# Altium PCB NC1-1C-BASIS.PcbDoc (part 2 of 4)
Units mm, origin at the board's own origin, x right, y up, seen from the top; angles counter-clockwise.
Board outline 78 x 78 mm, 4 copper layers (Top Layer, Mid 1 (GND), Mid 2 (PWR), Bottom Layer), stack 1.586 mm thick; 292 components, 134 nets, 825 pads, 380 vias.
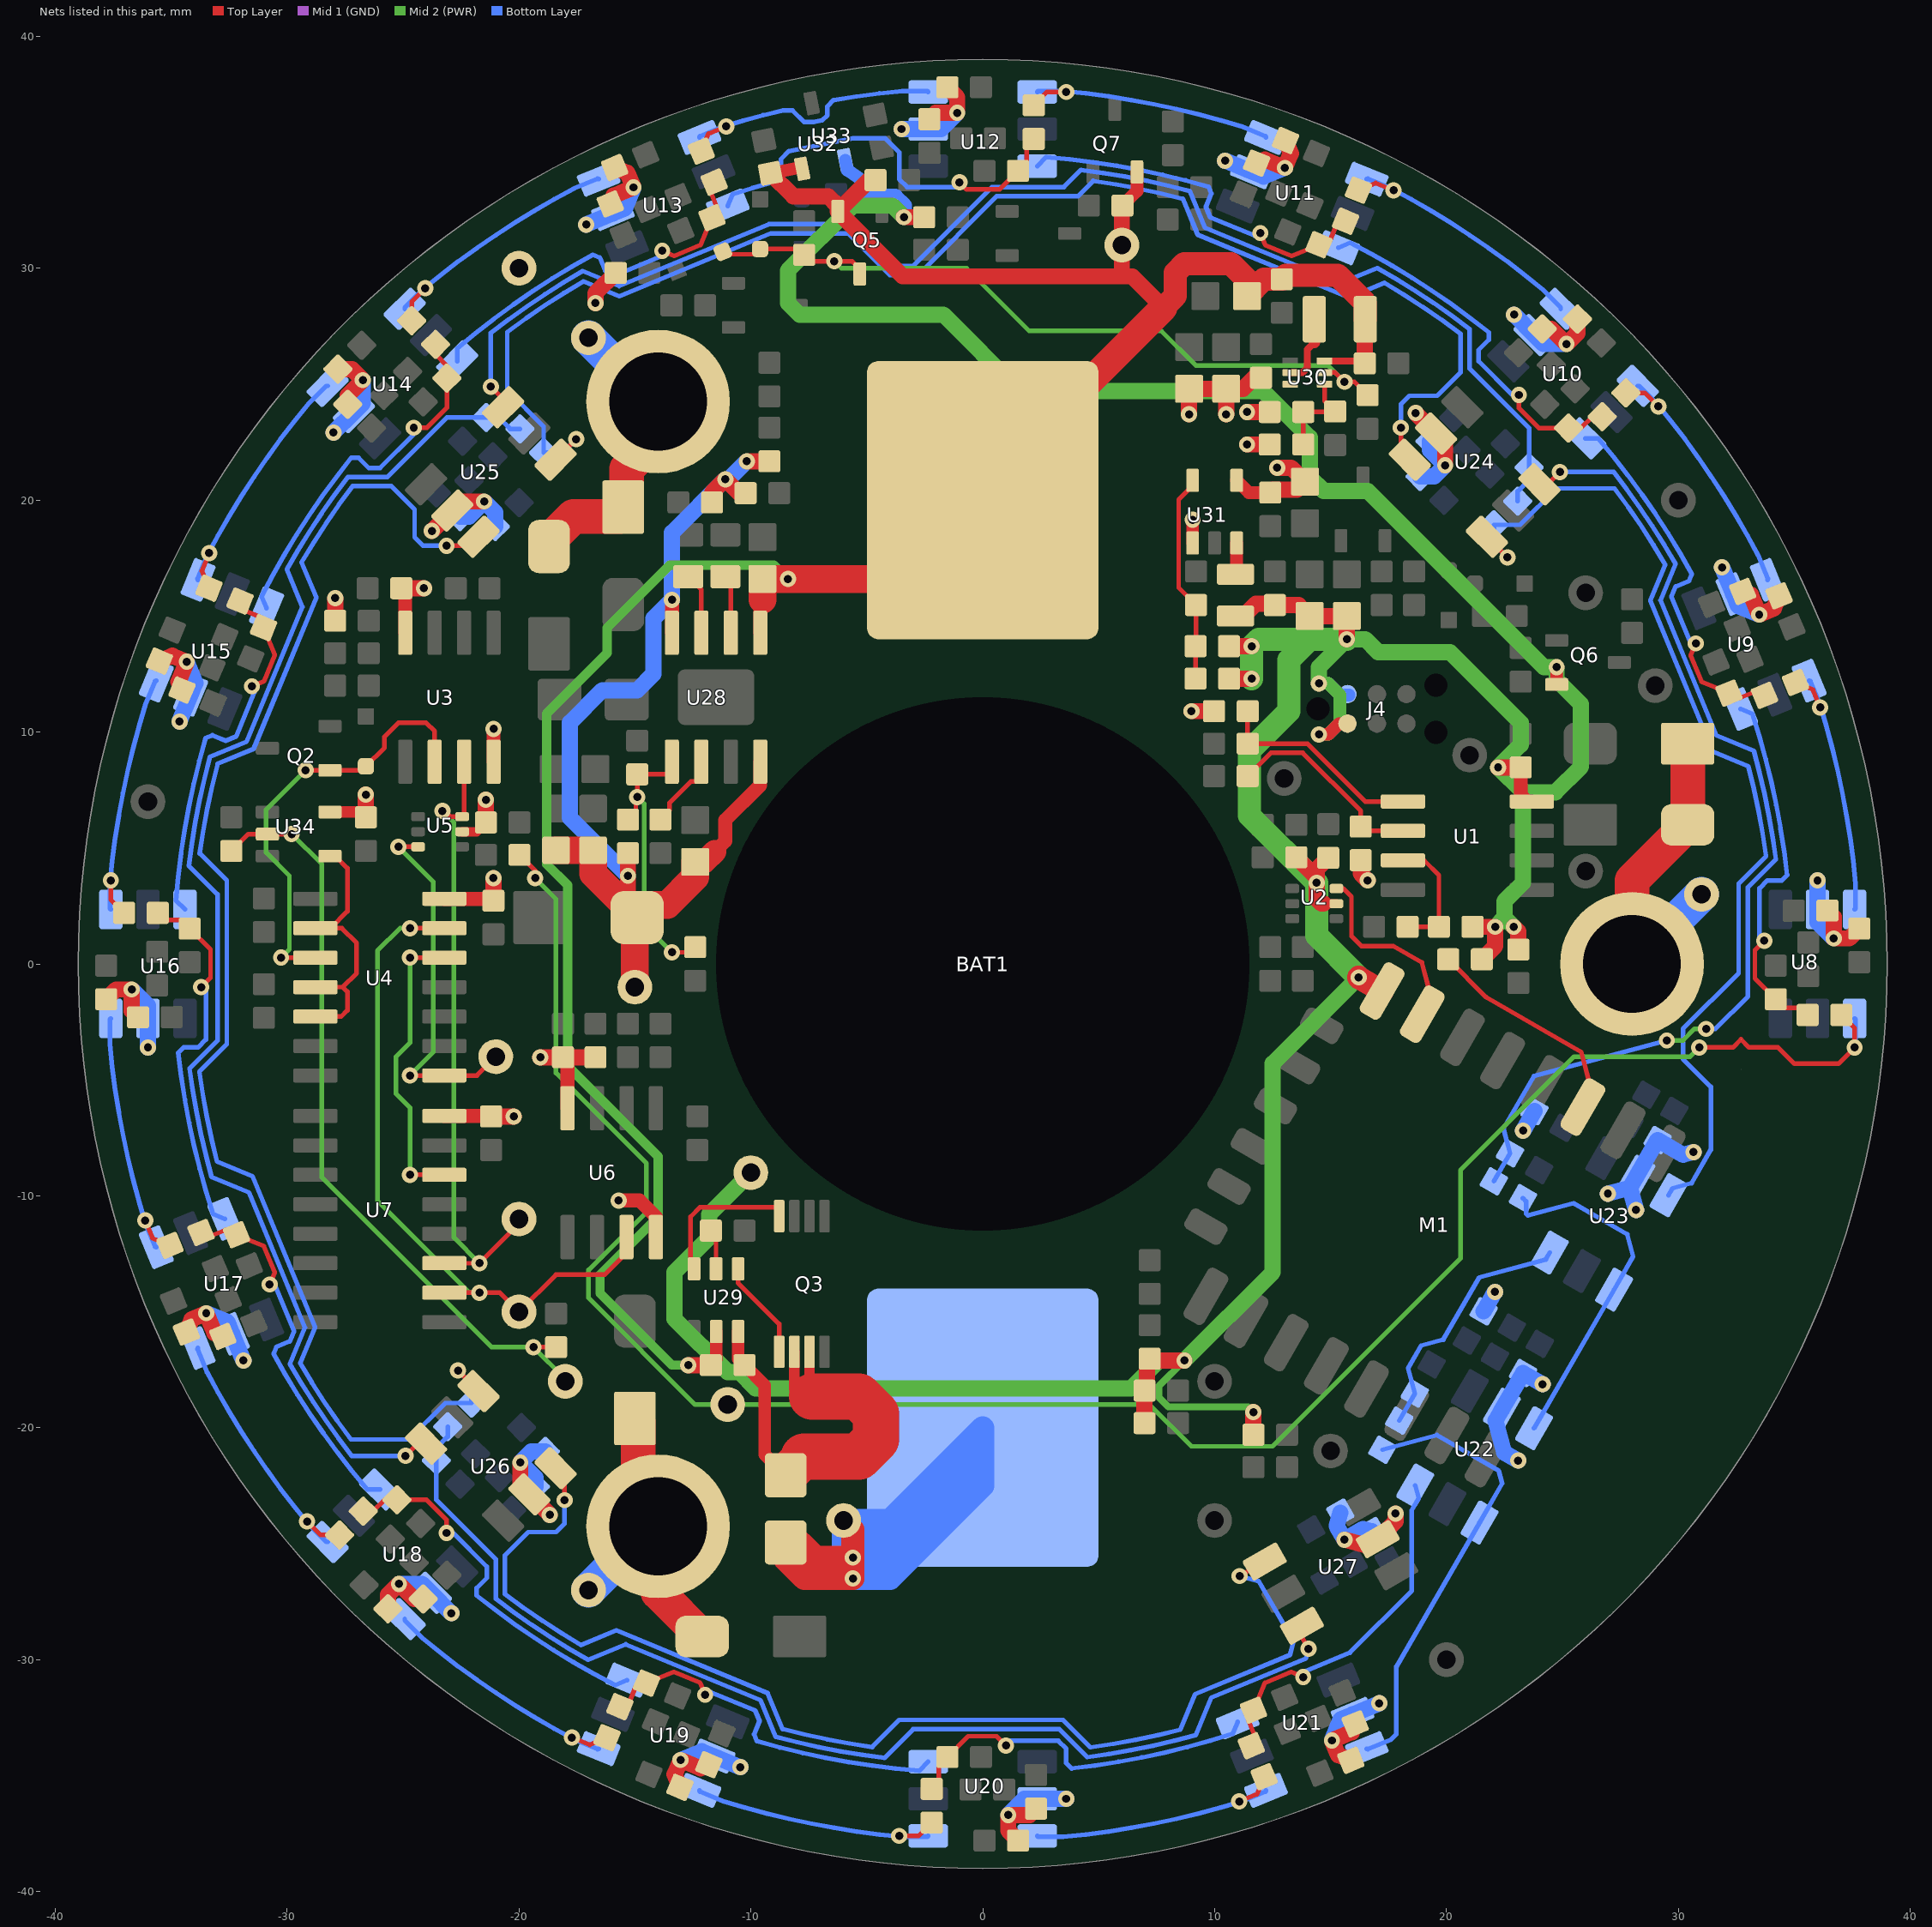
[diagram p4: the nets of this part, all layers, seen from the top]

## Part data (continued)
C58 C62: "CAP SM 0603 1.0nF 50V C0G", Absolute Value=1E-9, Manufacturer=GENERIC, Manufacturer 1=YAGEO, Manufacturer Part Number 1=CC0603JRNPO9BN102, Manufacturer Part Number 2=CC0603KRNPO9BN102, Package=0603, Supplier Part Number 1=311-1423-1-ND, Eurocircuits GPN=GPC0603102-C0G, HelpURL=https://www.yageo.com/upload/media/product/productsearch/datasheet/mlcc/UPY-GP_NP0_16V-to-50V_18.pdf, Manufacturer 2=YAGEO, Part Number=1.0N/0603/50V/C0G, Supplier 1=Digi-Key, Supplier 2=Digi-Key, Supplier Part Number 2=311-4026-1-ND
D1 D11 D12 D13 D14 D15: "40V 600mV@1A 1A SOD-323 Schottky Barrier Diodes (SBD) ROHS", Absolute Value=40V, JLC Type=Basic, Manufacturer=GENERIC, Manufacturer 3="Guangdong Hottech", Package=SOD323, HelpURL=https://datasheet.lcsc.com/lcsc/2204281430_Guangdong-Hottech-1N5819WS_C191023.pdf, Manufacturer Part Number 3=1N5819WS, Part Number=1N5819WS, Supplier 3=LCSC, Supplier Part Number 3=C191023
D2 D3 D4 D8 D9 D10: "Si Shottky Diode 3A DO-214AC", JLC Type=Basic, Manufacturer=GENERIC, Manufacturer 3=MDD, Package="DO-214AC, SMA", HelpURL=https://datasheet.lcsc.com/lcsc/2303141100_MDD-Microdiode-Electronics--SS34_C8678.pdf, Manufacturer Part Number 3=SS34, Part Number=SS34, Supplier 3=LCSC, Supplier Part Number 3=C8678
D5: "10.5V 6.45V 5.8V SMB(DO-214AA) TVS", Absolute Value=6.8V, JLC Type=Basic, Manufacturer="Littelfuse Inc.", Manufacturer 3=Brightking, Manufacturer Part Number 3=P6SMB6.8CA/TR13, Package=DO-214AA, HelpURL=https://datasheet.lcsc.com/lcsc/1810181007_Brightking-P6SMB6-8CA-TR13_C78395.pdf, Part Number=P6SMB6.8CA, Supplier 3=LCSC, Supplier Part Number 3=C78395
D6: library part "LED Green 0805", "Generic LED Green 0805", Absolute Value=Green, JLC Type=Basic, Manufacturer=GENERIC, Manufacturer 1=Würth, Manufacturer 3="Hubei KENTO Elec", Manufacturer Part Number 1=150080GS75000, Manufacturer Part Number 3=KT-0805G, Package=805, Supplier Part Number 1=732-4983-1-ND, HelpURL=https://www.we-online.com/katalog/datasheet/150060VS75000.pdf, Part Number="LED Green 0805", Supplier 1=Digi-Key, Supplier 3=LCSC, Supplier Part Number 3=C2297
D7: library part "LED Red 0805", "Generic LED Red 0805", Absolute Value=Red, JLC Type=Basic, Manufacturer=GENERIC, Manufacturer 1=Würth, Manufacturer 3="Foshan NationStar Optoelectronics", Manufacturer Part Number 1=150080RS75000, Manufacturer Part Number 3=NCD0805R1, Package=805, Supplier Part Number 1=732-4984-1-ND, HelpURL=https://www.we-online.com/katalog/datasheet/150060RS75000.pdf, Part Number="LED Red 0805", Supplier 1=Digi-Key, Supplier 3=LCSC, Supplier Part Number 3=C84256
F1 F2: "Multifuse 1206 1.5A", Absolute Value=1.5, JLC Type=Extended, Manufacturer=GENERIC, Manufacturer 1=Bourns, Manufacturer Part Number 1=MF-NSMF150-2, Package=1206, Supplier Part Number 1=MF-NSMF150-2CT-ND, HelpURL=https://www.bourns.com/docs/product-datasheets/mf-nsmf.pdf?sfvrsn=39c76af6_20, Manufacturer 3=Bourns, Manufacturer Part Number 3=MF-NSMF150-2, Part Number=1.5A/1206/Fuse, Supplier 1=Digi-Key, Supplier 3=LCSC, Supplier Part Number 3=C89655
J1 J2 J3: "Solder Nut M3x0.5, 2mm", JLC Type=Extended, Manufacturer=GENERIC, Manufacturer 2=PEM, Manufacturer 3=Sinhoo, Manufacturer Part Number 2=SMTSO-M3-2ET, Manufacturer Part Number 3=SMTSO3020MTJ, Part Number="PEM M3, 2mm", Supplier 2=Mouser, Supplier 3=LCSC, Supplier Part Number 2=153-SMTSO-M3-2ET, Supplier Part Number 3=C2915633
J4: "Tag-Connect 2030-NL, 6 pins, no legs, two-sided", Manufacturer=TAG-CONNECT, HelpURL=https://www.tag-connect.com/wp-content/uploads/bsk-pdf-manager/2022/06/TC2030-MCP-NL.pdf, Part Number=TAG-CON-6-NL-DUAL
J5: library part Solder_Jumper_2pin_0.3mm, "Solder jumper with two pins with a spacing of 0.3mm", Manufacturer=NONE, Part Number=Solder_Jumper_2pin_0.3mm
L1: "1UH 2520 Shielded Inductor SMD", Absolute Value=1E-6, JLC Type=Extended, Manufacturer=GENERIC, Manufacturer 1="INPAQ Technology Co., Ltd", Manufacturer 3=INPAQ, Manufacturer Part Number 1=WIP252010S-1R0MLDG, Manufacturer Part Number 3=WIP252012P-1R0ML, Package="2520 metric", Supplier Part Number 1=3526-WIP252010S-1R0MLDGCT-ND, HelpURL=https://mm.digikey.com/Volume0/opasdata/d220001/medias/docus/5561/WIP252010S%20L%20Series.pdf, Part Number=1UH/2520, Supplier 1=Digi-Key, Supplier 3=LCSC, Supplier Part Number 3=C315711
L2: "2.2UH 2016 Shielded Inductor SMD", Absolute Value=2.2E-6, JLC Type=Extended, Manufacturer=GENERIC, Manufacturer 1="INPAQ Technology Co., Ltd", Manufacturer 3=INPAQ, Manufacturer Part Number 1=WIP201610S-2R2MLDG, Manufacturer Part Number 3=WIP201610P-2R2ML, Package="2016 metric", Supplier Part Number 1=3526-WIP201610S-2R2MLDGCT-ND, HelpURL=https://mm.digikey.com/Volume0/opasdata/d220001/medias/docus/5561/WIP201610S%20L%20Series.pdf, Part Number=2.2UH/2016, Supplier 1=Digi-Key, Supplier 3=LCSC, Supplier Part Number 3=C315717
M1: "ESP8266 based Module with 4MByte Storage", JLC Type=Extended, Manufacturer=AI-Thinker, Manufacturer 3=Ai-Thinker, Manufacturer Part Number 3=ESP-12F(ESP8266MOD), Package=Board, Part Number=ESP-12F, Supplier 3=LCSC, Supplier Part Number 3=C82891
Q2: "Switching Transistor PNP Silicon", JLC Type=Extended, Manufacturer="ON SEMI", Manufacturer 3=ONSEMI, Manufacturer Part Number 3=MMBT4403LT1G, Package=SOT23, HelpURL=https://www.onsemi.com/pdf/datasheet/mmbt4403lt1-d.pdf, Part Number=MMBT4403L, Supplier 3=LCSC, Supplier Part Number 3=C78864
Q3: "20V 9A 7.6mΩ@4.5V,9A 1.25W 1.2V@250uA 2 N-Channel TSSOP-8", JLC Type=Extended, Manufacturer="Winsok Semicon", Package=TSSOP-8, HelpURL=https://www.lcsc.com/datasheet/lcsc_datasheet_2211141230_Winsok-Semicon-WSP8814_C148371.pdf, Manufacturer 3="Winsok Semicon", Manufacturer Part Number 3=WSP8814, Part Number=WSP8814, Supplier 3=LCSC, Supplier Part Number 3=C148371
Q5 Q6 Q7: "50V P-Channel MOSFET", JLC Type=Extended, Manufacturer=GENERIC, Manufacturer 1="Good-Ark Semiconductor", Manufacturer 3="Jiangsu Changjing Electronics Technology Co., Ltd.", Package=SOT23, Supplier Part Number 1=4786-BSS84CT-ND, HelpURL=https://goodarksemi.com/docs/datasheets/mosfets/BSS84.pdf, Manufacturer Part Number 1=BSS84, Manufacturer Part Number 3=BSS84, Part Number=BSS84, Supplier 1=Digi-Key, Supplier 3=LCSC, Supplier Part Number 3=C114481
Q8 Q9 Q10: "30V N-Channel MOSFET", JLC Type=Basic, Manufacturer="Alpha & Omega Semiconductor", Package=SOT23, HelpURL=https://aosmd.com/res/data_sheets/AO3400A.pdf, Manufacturer 3="Alpha & Omega Semiconductor", Manufacturer Part Number 3=AO3400A, Part Number=AO3400A, Supplier 3=LCSC, Supplier Part Number 3=C20917
R1 R2 R4 R5 R6 R7 R8 R10 R11 R12 R16 R17 R23 R91 R92: "RES SM 0603 1K5", Absolute Value=1500, JLC Type=Basic, Manufacturer=GENERIC, Manufacturer 1=YAGEO, Manufacturer 3="UNI-ROYAL(Uniroyal Elec)", Manufacturer Part Number 1=RC0603FR-131K5L, Manufacturer Part Number 2=RC0603FR-101K5L, Manufacturer Part Number 3=0603WAF1501T5E, Package=0603, Supplier Part Number 1=13-RC0603FR-131K5LCT-ND, HelpURL=https://www.yageo.com/upload/media/product/app/datasheet/rchip/pyu-rc_group_51_rohs_l.pdf, Manufacturer 2=YAGEO, Part Number=1K5/0603, Supplier 1=Digi-Key, Supplier 2=Digi-Key, Supplier 3=LCSC, Supplier Part Number 2=13-RC0603FR-101K5LCT-ND, Supplier Part Number 3=C22843
R3 R27 R28 R30 R31 R33 R34 R36 R37 R39 R40 R42 R43 R45 R46 R48 R49 R51 R52 R54 R55 R57 R58 R60 R61 R63 R64 R66 R67 R69 R70 R72 R73 R75 R76 R78 R79 R81 R82: "RES SM 0603 0R", Absolute Value=0, JLC Type=Basic, Manufacturer=GENERIC, Manufacturer 1=YAGEO, Manufacturer 3="UNI-ROYAL(Uniroyal Elec)", Manufacturer Part Number 1=RC0603FR-070RL, Manufacturer Part Number 2=RC0603FR-130RL, Manufacturer Part Number 3=0603WAF0000T5E, Package=0603, Supplier Part Number 1=311-0.0HRCT-ND, HelpURL=https://www.yageo.com/upload/media/product/app/datasheet/rchip/pyu-rc_group_51_rohs_l.pdf, Manufacturer 2=YAGEO, Part Number=0R/0603, Supplier 1=Digi-Key, Supplier 2=Digi-Key, Supplier 3=LCSC, Supplier Part Number 2=13-RC0603FR-130RLCT-ND, Supplier Part Number 3=C21189
  R3: Eurocircuits GPN=GPR06030R
R9 R24 R25 R26 R29 R32 R35 R38 R41 R44 R47 R50 R53 R56 R59 R62 R65 R68 R71 R74 R77 R80 R83 R86 R87: "RES SM 0603 270R", Absolute Value=270, JLC Type=Basic, Manufacturer=GENERIC, Manufacturer 1=YAGEO, Manufacturer 3="UNI-ROYAL(Uniroyal Elec)", Manufacturer Part Number 1=RC0603FR-13270RL, Manufacturer Part Number 2=RC0603FR-10270RL, Manufacturer Part Number 3=0603WAF2700T5E, Package=0603, Supplier Part Number 1=13-RC0603FR-13270RLCT-ND, HelpURL=https://www.yageo.com/upload/media/product/productsearch/datasheet/rchip/PYu-RC_Group_51_RoHS_L_12.pdf, Manufacturer 2=YAGEO, Part Number=270R/0603, Supplier 1=Digi-Key, Supplier 2=Digi-Key, Supplier 3=LCSC, Supplier Part Number 2=13-RC0603FR-10270RLCT-ND, Supplier Part Number 3=C22966
  R9: Eurocircuits GPN=GPR0603270R
R13 R98 R99 R101 R107: "RES SM 0603 22K", Absolute Value=22000, JLC Type=Basic, Manufacturer=GENERIC, Manufacturer 1=YAGEO, Manufacturer 3="UNI-ROYAL(Uniroyal Elec)", Manufacturer Part Number 1=RC0603FR-1322KL, Manufacturer Part Number 2=RC0603FR-1022KL, Manufacturer Part Number 3=0603WAF2202T5E, Package=0603, Supplier Part Number 1=13-RC0603FR-1322KLCT-ND, HelpURL=https://www.yageo.com/upload/media/product/app/datasheet/rchip/pyu-rc_group_51_rohs_l.pdf, Manufacturer 2=YAGEO, Part Number=22K/0603, Supplier 1=Digi-Key, Supplier 2=Digi-Key, Supplier 3=LCSC, Supplier Part Number 2=13-RC0603FR-1022KLCT-ND, Supplier Part Number 3=C31850
  R13: Eurocircuits GPN=GPR060322K
R14: "RES SM 0603 12K", Absolute Value=12000, Manufacturer=GENERIC, Manufacturer 1=YAGEO, Manufacturer Part Number 1=RC0603FR-1312KL, Manufacturer Part Number 2=RC0603FR-1012KL, Package=0603, Supplier Part Number 1=13-RC0603FR-1312KLCT-ND, Eurocircuits GPN=GPR060312K, HelpURL=https://www.yageo.com/upload/media/product/app/datasheet/rchip/pyu-rc_group_51_rohs_l.pdf, Manufacturer 2=YAGEO, Part Number=12K/0603, Supplier 1=Digi-Key, Supplier 2=Digi-Key, Supplier Part Number 2=13-RC0603FR-1012KLCT-ND
R15 R89: "RES NTC SM 0603 10K", Absolute Value=10000, JLC Type=Extended, Manufacturer=GENERIC, Manufacturer 1=Murata, Manufacturer 3=Sunlord, Manufacturer Part Number 1=NCU18XH103E60RB, Manufacturer Part Number 3=SDNT1608X103F3380FTF, Package=603, Supplier Part Number 1=490-18164-1-ND, HelpURL=https://www.murata.com/en-us/api/pdfdownloadapi?cate=luNTCforTempeSenso&partno=NCU18XH103E60RB, Part Number=10K/0603/NTC/3380K, Supplier 1=Digi-Key, Supplier 3=LCSC, Supplier Part Number 3=C316397
R19 R22 R90 R93 R94 R95 R100 R102 R103 R105 R106 R108 R111: "RES SM 0603 100K", Absolute Value=100000, JLC Type=Basic, Manufacturer=GENERIC, Manufacturer 1=YAGEO, Manufacturer 3="UNI-ROYAL(Uniroyal Elec)", Manufacturer Part Number 1=RC0603FR-13100KL, Manufacturer Part Number 2=RC0603FR-10100KL, Manufacturer Part Number 3=0603WAF1003T5E, Package=0603, Supplier Part Number 1=13-RC0603FR-13100KLCT-ND, HelpURL=https://www.yageo.com/upload/media/product/productsearch/datasheet/rchip/PYu-RC_Group_51_RoHS_L_12.pdf, Manufacturer 2=YAGEO, Part Number=100K/0603, Supplier 1=Digi-Key, Supplier 2=Digi-Key, Supplier 3=LCSC, Supplier Part Number 2=13-RC0603FR-10100KLCT-ND, Supplier Part Number 3=C25803
R20: "RES SM 0603 20R", Absolute Value=20, JLC Type=Basic, Manufacturer=GENERIC, Manufacturer 1=YAGEO, Manufacturer 3="UNI-ROYAL(Uniroyal Elec)", Manufacturer Part Number 1=RC0603FR-1320RL, Manufacturer Part Number 2=RC0603FR-1020RL, Manufacturer Part Number 3=0603WAF200JT5E, Package=0603, Supplier Part Number 1=13-RC0603FR-1320RLCT-ND, HelpURL=https://www.yageo.com/upload/media/product/app/datasheet/rchip/pyu-rc_group_51_rohs_l.pdf, Manufacturer 2=YAGEO, Part Number=20R/0603, Supplier 1=Digi-Key, Supplier 2=Digi-Key, Supplier 3=LCSC, Supplier Part Number 2=13-RC0603FR-1020RLCT-ND, Supplier Part Number 3=C22950
R21: "RES SM 0603 3K3", Absolute Value=3300, Manufacturer=GENERIC, Manufacturer 1=YAGEO, Manufacturer Part Number 1=RC0603FR-133K3L, Manufacturer Part Number 2=RC0603FR-103K3L, Package=0603, Supplier Part Number 1=13-RC0603FR-133K3LCT-ND, Eurocircuits GPN=GPR06033K3, HelpURL=https://www.yageo.com/upload/media/product/app/datasheet/rchip/pyu-rc_group_51_rohs_l.pdf, Manufacturer 2=YAGEO, Part Number=3K3/0603, Supplier 1=Digi-Key, Supplier 2=Digi-Key, Supplier Part Number 2=13-RC0603FR-103K3LCT-ND
R84 R85: "RES SM 0805 1R", Absolute Value=1, JLC Type=Basic, Manufacturer=GENERIC, Manufacturer 1=YAGEO, Manufacturer 3="UNI-ROYAL(Uniroyal Elec)", Manufacturer Part Number 1=RC0805FR-131RL, Manufacturer Part Number 2=RC0805FR-101RL, Manufacturer Part Number 3=0805W8F100KT5E, Package=805, Supplier Part Number 1=13-RC0805FR-131RLCT-ND, HelpURL=https://www.yageo.com/upload/media/product/productsearch/datasheet/rchip/PYu-RC_Group_51_RoHS_L_12.pdf, Manufacturer 2=YAGEO, Part Number=1R/0805, Supplier 1=Digi-Key, Supplier 2=Digi-Key, Supplier 3=LCSC, Supplier Part Number 2=13-RC0805FR-101RLCT-ND, Supplier Part Number 3=C25271
R88: "RES SM 0603 4K7", Absolute Value=4700, JLC Type=Basic, Manufacturer=GENERIC, Manufacturer 1=YAGEO, Manufacturer 3="UNI-ROYAL(Uniroyal Elec)", Manufacturer Part Number 1=RC0603FR-134K7L, Manufacturer Part Number 2=RC0603FR-104K7L, Manufacturer Part Number 3=0603WAF4701T5E, Package=0603, Supplier Part Number 1=13-RC0603FR-134K7LCT-ND, HelpURL=https://www.yageo.com/upload/media/product/app/datasheet/rchip/pyu-rc_group_51_rohs_l.pdf, Manufacturer 2=YAGEO, Part Number=4K7/0603, Supplier 1=Digi-Key, Supplier 2=Digi-Key, Supplier 3=LCSC, Supplier Part Number 2=13-RC0603FR-104K7LCT-ND, Supplier Part Number 3=C23162
R96: "RES SM 0603 1K", Absolute Value=1000, JLC Type=Basic, Manufacturer=GENERIC, Manufacturer 1=YAGEO, Manufacturer 3="UNI-ROYAL(Uniroyal Elec)", Manufacturer Part Number 1=RC0603FR-131KL, Manufacturer Part Number 2=RC0603FR-101KL, Manufacturer Part Number 3=0603WAF1001T5E, Package=0603, Supplier Part Number 1=13-RC0603FR-131KLCT-ND, Eurocircuits GPN=GPR06031K, HelpURL=https://www.yageo.com/upload/media/product/app/datasheet/rchip/pyu-rc_group_51_rohs_l.pdf, Manufacturer 2=YAGEO, Part Number=1K/0603, Supplier 1=Digi-Key, Supplier 2=Digi-Key, Supplier 3=LCSC, Supplier Part Number 2=13-RC0603FR-101KLCT-ND, Supplier Part Number 3=C21190
R97: "RES SM 0603 13K", Absolute Value=13000, JLC Type=Basic, Manufacturer=GENERIC, Manufacturer 1=YAGEO, Manufacturer 3="UNI-ROYAL(Uniroyal Elec)", Manufacturer Part Number 1=RC0603FR-1313KL, Manufacturer Part Number 2=RC0603FR-1013KL, Manufacturer Part Number 3=0603WAF1302T5E, Package=0603, Supplier Part Number 1=13-RC0603FR-1313KLCT-ND, HelpURL=https://www.yageo.com/upload/media/product/productsearch/datasheet/rchip/PYu-RC_Group_51_RoHS_L_12.pdf, Manufacturer 2=YAGEO, Part Number=13K/0603, Supplier 1=Digi-Key, Supplier 2=Digi-Key, Supplier 3=LCSC, Supplier Part Number 2=13-RC0603FR-1013KLCT-ND, Supplier Part Number 3=C22797
R104: "RES SM 0603 620R", Absolute Value=620, Manufacturer=GENERIC, Manufacturer 1=YAGEO, Manufacturer Part Number 1=RC0603FR-13620RL, Manufacturer Part Number 2=RC0603FR-10620RL, Package=0603, Supplier Part Number 1=13-RC0603FR-13620RLCT-ND, Eurocircuits GPN=GPR0603620R, HelpURL=https://www.yageo.com/upload/media/product/productsearch/datasheet/rchip/PYu-RC_Group_51_RoHS_L_12.pdf, Manufacturer 2=YAGEO, Part Number=620R/0603, Supplier 1=Digi-Key, Supplier 2=Digi-Key, Supplier Part Number 2=13-RC0603FR-10620RLCT-ND
R109: "RES SM 0603 10M", Absolute Value=10000000, JLC Type=Basic, Manufacturer=GENERIC, Manufacturer 1=YAGEO, Manufacturer 3="UNI-ROYAL(Uniroyal Elec)", Manufacturer Part Number 1=RC0603FR-1310ML, Manufacturer Part Number 2=RC0603FR-1010ML, Manufacturer Part Number 3=0603WAF1005T5E, Package=603, Supplier Part Number 1=13-RC0603FR-1310MLCT-ND, HelpURL=https://www.yageo.com/upload/media/product/productsearch/datasheet/rchip/PYu-RC_Group_51_RoHS_L_12.pdf, Manufacturer 2=YAGEO, Part Number=10M/0603, Supplier 1=Digi-Key, Supplier 2=Digi-Key, Supplier 3=LCSC, Supplier Part Number 2=13-RC0603FR-1010MLCT-ND, Supplier Part Number 3=C7250
R112 R113: "RES SM 0603 2K2", Absolute Value=2200, Manufacturer=GENERIC, Manufacturer 1=YAGEO, Manufacturer Part Number 1=RC0603FR-132K2L, Manufacturer Part Number 2=RC0603FR-102K2L, Manufacturer Part Number 3=RC0603JR-072K2L, Package=0603, Supplier Part Number 1=13-RC0603FR-132K2LCT-ND, Eurocircuits GPN=GPR06032K2, HelpURL=https://www.yageo.com/upload/media/product/app/datasheet/rchip/pyu-rc_group_51_rohs_l.pdf, Manufacturer 2=YAGEO, Manufacturer 3=YAGEO, Part Number=2K2/0603, Supplier 1=Digi-Key, Supplier 2=Digi-Key, Supplier 3=LCSC, Supplier Part Number 2=13-RC0603FR-102K2LCT-ND, Supplier Part Number 3=C113303
TP1 TP2 TP3 TP4 TP5 TP6 TP7 TP8 TP9 TP10 TP11 TP12 TP13 TP14 TP15 TP16 TP17 TP18 TP19 TP20 TP21 TP22 TP23 TP24: "THT Test Point 1.5/0.8mm", Manufacturer=NONE, Part Number=TP_THD_1.5/0.8
U1: "I2C-Compatible (2-wire) Serial EEPROM 2K bits", JLC Type=Extended, Manufacturer=Zetta, Manufacturer Part Number 3=ZD24C02B-SSGMB, Package=SOIC-8, HelpURL=https://datasheet.lcsc.com/lcsc/2402020955_Zetta-ZD24C02B-SSGMB_C5374786.pdf, Manufacturer 3=Zetta, Part Number=ZD24C02B, Supplier 3=LCSC, Supplier Part Number 3=C5374786
U2: "Single-Pole-Double-Throw Analog Switch", Manufacturer=TI, Manufacturer 3="Texas Instruments", Manufacturer Part Number 3=SN74LVC1G3157DCKR, Package=SOT-363-6, Part Number=SN74LVC1G3157, Supplier 3=LCSC, Supplier Part Number 3=C38663
U3 U6: "SOP-8 Timers / Clock Oscillators ROHS", JLC Type=Extended, Manufacturer=XINLUDA, Package=SOP8, HelpURL=https://datasheet.lcsc.com/lcsc/2212101330_XINLUDA-XL555_C521186.pdf, Manufacturer 3=XINLUDA, Manufacturer Part Number 3=XL555, Part Number=XL555, Supplier 3=LCSC, Supplier Part Number 3=C521186
U4: "Quad 2-input NAND", JLC Type=Extended, Manufacturer="Wuxi I-core Elec", Manufacturer Part Number 3=AIP74HC00SA.TB, Package=SOP-14, Manufacturer 3="Wuxi I-core Elec", Part Number=AIP74HC00, Supplier 3=LCSC, Supplier Part Number 3=C2943283
U5: "Single 2-input multiplexer", JLC Type=Extended, Manufacturer=Nexperia, Manufacturer Part Number 3=74LVC1G157GW,125, Package=SOT-363-6, Manufacturer 3=Nexperia, Part Number=74LVC1G157, Supplier 3=LCSC, Supplier Part Number 3=C135822
U7: "12-Stage binary ripple Counter", JLC Type=Extended, Manufacturer=HGSEMI, Manufacturer Part Number 3=CD4040BM/TR, Package=SOP-16, Manufacturer 3=HGSEMI, Part Number=CD4040BC, Supplier 3=LCSC, Supplier Part Number 3=C725347
U8 U9 U10 U11 U12 U13 U14 U15 U16 U17 U18 U19 U20 U21 U22 U23 U24 U25 U26 U27: "Intelligent control LED integrated light source with backup Pin", JLC Type=Extended, Manufacturer=WorldSemi, Package=SMD5050, HelpURL=https://datasheet.lcsc.com/lcsc/2012110135_Worldsemi-WS2813B-V5_C965558.pdf, Manufacturer 3=WorldSemi, Manufacturer Part Number 3=WS2813B-V5, Part Number=WS2813B-V5, Supplier 3=LCSC, Supplier Part Number 3=C965558
U28: "1A Standalone Linear Li-lon Battery Charger with Thermal Regulation in SOP-8", JLC Type=Extended, Manufacturer=MSKSEMI, Package=SOP-8, HelpURL=https://datasheet.lcsc.com/lcsc/2308080947_MSKSEMI-TP4056-MS_C7473158.pdf, Manufacturer 3=MSKSEMI, Manufacturer Part Number 3=TP4056-MS, Part Number=TP4056-MS, Supplier 3=LCSC, Supplier Part Number 3=C7473158
U29: "Single Cell Lithium-ion battery protection IC", JLC Type=Extended, Manufacturer=PUOLOP, Package=SOT23-6, HelpURL=https://datasheet.lcsc.com/lcsc/1912111437_PUOLOP-DW01A_C351410.pdf, Manufacturer 3=PUOLOP, Manufacturer Part Number 3=DW01A, Part Number=DW01A, Supplier 3=LCSC, Supplier Part Number 3=C351410
U30: "3.7-A Boost Converter with 0.5-V Ultra-low Input Voltage", JLC Type=Extended, Manufacturer="Texas Instruments", Package=SOT563, Supplier Part Number 1=296-TPS61023DRLRTR-ND, HelpURL=https://www.ti.com/lit/ds/symlink/tps61023.pdf, Manufacturer 1="Texas Instruments", Manufacturer 3="Texas Instruments", Manufacturer Part Number 1=TPS61023, Manufacturer Part Number 3=TPS61023, Part Number=TPS61023, Supplier 1=Digi-Key, Supplier 3=LCSC, Supplier Part Number 3=C919459
U31: "1.5A 2MHz 5.5V Synchronous Buck Converter", JLC Type=Extended, Manufacturer=Zetta, Manufacturer Part Number 3=ZD8028IB5TR, Package=SOT23-5, HelpURL=https://datasheet.lcsc.com/lcsc/2203221830_Zetta-ZD8028IB5TR_C2928932.pdf, Manufacturer 3=Zetta, Part Number=ZD8028C, Supplier 3=LCSC, Supplier Part Number 3=C2928932
U32 U33: "MT8691AT Uni-polar, Nano Power Hall-Effect Switch IC", JLC Type=Extended, Manufacturer="Magn Tek", Package=SOT23, HelpURL=https://www.lcsc.com/datasheet/lcsc_datasheet_2304140030_Magn-Tek-MT8691AT_C879625.pdf, Manufacturer 3="Magn Tek", Manufacturer Part Number 3=MT8691AT, Part Number=MT8691AT, Supplier 3=LCSC, Supplier Part Number 3=C879625
U34: "Single inverter, SOT23-5", JLC Type=Extended, Manufacturer=Nexperia, Manufacturer 1="Nexperia USA Inc.", Manufacturer Part Number 1=74HCT1G04GV,125, Package=SOT23-5, Supplier Part Number 1=1727-6925-1-ND, HelpURL=https://assets.nexperia.com/documents/data-sheet/74HC_HCT1G04.pdf, Manufacturer 3=Nexperia, Manufacturer Part Number 3=74HCT1G04GV,125, Part Number=74HCT1G04GV, Supplier 1=Digi-Key, Supplier 3=LCSC, Supplier Part Number 3=C12503

## Via types
v1: diameter 0.7, hole 0.35, Top Layer to Bottom Layer, tented both sides, 372 vias
v2: diameter 0.7, hole 0.35, Top Layer to Bottom Layer, 8 vias

## Nets (pads, with @x,y where several pads share a name; then routed paths per layer and width w, separated by ;. In a path a pad name is that pad's centre, name@x,y a point inside that pad or via, vN(x,y) a via of type N, cw(c..) or ccw(c..) an arc to the next point about the centre after c; other vN are vias at no path point)
3V3_FB: C62.2 R94.2 R98.1 U31.5 | length 9.1
  Top Layer w0.2: U31.5@9.05,20.85 9.05,20.625 8.45,20.025 8.45,16.225 R98.1@9.2,15.475 9.2,13.725 R94.2@9.175,13.7 C62.2@9.175,12.3
3V3_SW: L2.1 U31.3 | length 1.4
  Top Layer w0.55: L2.1@10.9,16.8 10.95,16.85 U31.3@10.95,18.15
5V2_FB: C58.2 R93.2 R97.2 U30.1@14.74,25 | length 4.2
  Top Layer w0.2: R93.2@13.825,22.4 C58.2@13.825,23.8 15.175,23.8 R97.2@15.2,23.825 14.74,24.285 U30.1@14.74,25
5V2_SW: L1.2 U30.5 | length 3
  Top Layer w0.3: U30.5@13.26,25.5 13.8,25.5 14,25.7 14,26.5 14.3,26.8
  Top Layer w0.5: 14.3,26.8 L1.2@14.3,27.8
+3V3: C1.1 C2.1 C62.1 C68.2 C69.1 C70.1 C73.1 J4.1 L2.2 M1.8 Q6.2 R1.1 R2.1 R6.1 R7.1 R8.1 R13.1 R16.1 R17.1 R94.1 R101.1 R112.1 R113.1 TP21.1 U1.8 U2.5 U33.1@-5.926,34.66 | length 198.2
  Top Layer w0.4: 14.7,2.6 U2.5@15.25,2.6
  Top Layer w0.55: v1(14.5,9.9) 14.9,9.9 15.365,10.365 J4.1@15.73,10.365 ; Q6.2@24.75,12.05 v1(24.75,12.8)
  Top Layer w0.6: C1.1@23.2,8.475 23.2,7.3 23.495,7.005 U1.8@23.68,7.005
  Top Layer w0.7: v1(-3.4,32.2) R101.1@-2.525,32.2 ; R113.1@6.975,-19.8 R112.1@6.975,-18.4 7.087,-18.287 7.087,-17.138 R1.1@7.2,-17.025 7.275,-17.1 v1(8.7,-17.1) ; v1(9,10.9) R8.1@9.975,10.9 ; C62.1@10.625,12.3 v1(11.6,12.3) ; R94.1@10.625,13.7 v1(11.6,13.7) ; L2.2@10.9,15 11,15.1 11.35,15.1 11.788,15.537 C68.2@12.6,15.537 ; R2.1@11.675,-20.3 v1(11.675,-19.325) ; C68.2@12.6,15.475 13.625,15.475 C69.1@14.1,15 C70.1@15.7,15 v1(15.7,14) ; R13.1@13.525,4.6 v1@14.4,3.725 ; 14.7,2.6 14.6,2.6 14.4,2.8 v1(14.4,3.5) v1@14.4,3.725 ; C2.1@14.9,4.575 14.4,4.075 v1@14.4,3.725 ; R7.1@16.3,4.475 16.3,3.9 v1(16.6,3.6) ; R6.1@21.125,1.6 v1(22.1,1.6) 22.1,0.775 R16.1@21.525,0.2 ; v1(22.225,8.475) C1.1@23.2,8.475 ; v1(22.9,1.6) 23.1,1.4 R17.1@23.1,0.625
  Top Layer w1: v1(16.21,-0.583) M1.8@17.223,-1.168
  Mid 2 (PWR) w0.3: v1(8.7,-17.1) 7.6,-18.2 7.6,-18.7 8,-19.1 11.45,-19.1 v1(11.675,-19.325)
  Mid 2 (PWR) w0.55: v1(14.5,9.9) 14.9,9.9 15.4,10.4 15.4,11.6 14.9,12.1 v1(14.5,12.1)
  Mid 2 (PWR) w0.7: TP21.1@-10,-9 -11.8,-10.8 -11.8,-11.8 -13.3,-13.3 -13.3,-15.3 -11,-17.6 -10.5,-17.6 -9.8,-18.3 6.4,-18.3 7.6,-17.1 v1(8.7,-17.1) 12.5,-13.3 12.5,-4.293 v1(16.21,-0.583) ; v1(-3.4,32.2) -3.9,32.7 -5.6,32.7 -8.4,29.9 -8.4,28.5 -7.9,28 -1.7,28 1.6,24.7 12.1,24.7 14.1,22.7 14.1,21 14.7,20.4 16.6,20.4 24.2,12.8 v1(24.75,12.8) 24.75,12.25 25.8,11.2 25.8,8.5 24.7,7.4 23.3,7.4 ; v1(14.5,12.1) 14.5,12.8 v1(15.7,14) 16.498,14 17.048,13.45 20.15,13.45 23.2,10.4 23.2,9.45 v1(22.225,8.475) 23.3,7.4 ; v1(22.1,1.6) 22.5,2 ; v1(22.9,1.6) 22.5,2 ; 22.5,2 22.5,2.7 23.3,3.5 23.3,7.4
  Mid 2 (PWR) w1: v1(11.6,12.3) v1(11.6,13.7) 11.9,14 14.1,14 ; v1(15.7,14) 14.1,14 ; v1(16.21,-0.583) 14.4,1.227 v1(14.4,3.5) 11.5,6.4 11.5,9.2 13.2,10.9 13.2,13.1 14.1,14
  Bottom Layer w0.55: U33.1@-5.926,34.66 -5.84,34.227 -5.401,33.934 -4.927,33.459 C73.1@-4.875,33.2 ; v1(14.5,12.1) 14.9,12.1 15.4,11.6 J4.1@15.8,11.6
  Bottom Layer w0.7: C73.1@-4.875,33.2 -4.75,33.075 -3.775,33.075 -3.4,32.7 v1(-3.4,32.2)
+5V2: C4.1 C7.1 C8.1 C12.1 C13.1 C14.1 C16.1 C18.1 C20.1 C22.1 C24.1 C26.1 C28.1 C30.1 C32.1 C34.1 C36.1 C38.1 C40.1 C42.1 C44.1 C46.1 C48.1 C50.1 C53.1 C58.1 C63.2 C64.1 C65.1 C66.1 C67.2 C77.1 R19.1 R23.1 R26.1 R29.1 R32.1 R35.1 R38.1 R41.1 R44.1 R47.1 R50.1 R53.1 R56.1 R59.1 R62.1 R65.1 R68.1 R71.1 R74.1 R77.1 R80.1 R83.1 R93.1 R99.2 TP20.1 U3.4 U3.8 U4.14 U5.5 U6.4 U6.8 U7.16 U8.2 U9.2 U10.2 U11.2 U12.2 U13.2 U14.2 U15.2 U16.2 U17.2 U18.2 U19.2 U20.2 U21.2 U22.2 U23.2 U24.2 U25.2 U26.2 U27.2 U30.6 U31.1@9.05,18.15 U31.4 U34.5 | length 148.9
  Top Layer w0.4: U5.5@-22.45,5.7 -21.825,5.7 C8.1@-21.425,6.1
  Top Layer w0.5: U34.5@-28.15,6.55 -26.825,6.55 C77.1@-26.66,6.385
  Top Layer w0.55: U31.1@9.05,18.15 v1(9.05,19.15) ; U31.4@10.95,20.85 11.475,20.325 C67.2@12.4,20.325
  Top Layer w0.6: C4.1@-25.075,16.2 -24.905,16.03 U3.8@-24.905,14.28 ; U7.16@-23.22,-6.555 C13.1@-21.22,-6.555 ; U4.14@-23.22,2.81 -23.215,2.805 -21.18,2.805 C7.1@-21.1,2.725 ; U3.4@-21.095,8.72 v1(-21.095,10.14) ; C12.1@-18.1,-4.025 -17.905,-4.22 U6.8@-17.905,-6.22 ; v1(-15.7,-10.2) -14.8,-10.2 -14.095,-10.905 U6.4@-14.095,-11.78
  Top Layer w0.7: C30.1@-37.8,-1.525 -37.375,-1.1 v1(-36.7,-1.1) -36.7,-2.025 R50.1@-36.425,-2.3 ; C28.1@-35.506,13.057 -34.951,13.287 v1(-34.327,13.028) -34.681,12.174 R47.1@-34.532,11.814 ; C32.1@-34.339,-15.874 -34.109,-15.319 v1(-33.485,-15.061) -33.131,-15.915 R53.1@-32.772,-16.064 ; R19.1@-27.925,14.8 v1(-27.925,15.775) ; C26.1@-27.807,25.65 -27.206,25.65 v1(-26.729,25.173) -27.383,24.519 R44.1@-27.383,24.13 ; C77.1@-26.6,6.325 v1(-26.6,7.3) ; C34.1@-25.65,-27.807 -25.65,-27.206 v1(-25.173,-26.729) -24.519,-27.383 R56.1@-24.13,-27.383 ; C4.1@-25.075,16.2 v1(-24.1,16.2) ; v1(-23.759,18.668) U25.2@-22.875,19.552 -22.486,19.94 v1(-21.496,19.94) ; C8.1@-21.425,6.1 v1(-21.425,7.075) ; C13.1@-21.2,-6.575 v1(-20.225,-6.575) ; C7.1@-21.1,2.725 v1(-21.1,3.7) ; v1(-19.94,-21.496) -19.94,-22.486 U26.2@-19.552,-22.875 v1(-18.668,-23.759) ; v1(-19.075,-4.025) C12.1@-18.1,-4.025 R23.1@-16.7,-4.025 ; v1(-16.7,28.5) -16.7,28.925 R99.2@-15.825,29.8 ; R41.1@-16.064,32.772 -15.915,33.131 v1(-15.061,33.485) -15.319,34.109 C24.1@-15.874,34.339 ; C36.1@-13.057,-35.506 -13.287,-34.951 v1(-13.028,-34.327) -12.174,-34.681 R59.1@-11.814,-34.532 ; R38.1@-2.3,36.425 -2.025,36.7 v1(-1.1,36.7) -1.1,37.375 C22.1@-1.525,37.8 ; C38.1@1.525,-37.8 1.1,-37.375 v1(1.1,-36.7) 2.025,-36.7 R62.1@2.3,-36.425 ; v1(8.9,23.7) C64.1@8.9,24.8 C65.1@10.5,24.8 ; v1(10.5,23.7) C65.1@10.5,24.8 ; v1(11.4,22.4) R93.1@12.375,22.4 ; v1(11.4,23.8) C58.1@12.375,23.8 ; R35.1@11.814,34.532 12.174,34.681 v1(13.028,34.327) 13.287,34.951 C20.1@13.057,35.506 ; C63.2@12,25.275 11.7,25.275 11.225,24.8 C65.1@10.5,24.8 ; C67.2@12.4,20.325 12.525,20.45 13.55,20.45 C66.1@13.9,20.8 13.3,21.4 v1(12.7,21.4) ; v1(15.603,-24.825) 16.559,-25.081 U27.2@17.035,-24.806 17.8,-24.041 v1(17.8,-23.7) ; C40.1@15.874,-34.339 15.319,-34.109 v1(15.061,-33.485) 15.915,-33.131 R65.1@16.064,-32.772 ; v1(18.668,23.759) U24.2@19.552,22.875 19.94,22.486 v1(19.94,21.496) ; R32.1@24.13,27.383 24.519,27.383 v1(25.173,26.729) 25.65,27.206 C18.1@25.65,27.807 ; R29.1@32.772,16.064 33.131,15.915 v1(33.485,15.061) 34.109,15.319 C16.1@34.339,15.874 ; R26.1@36.425,2.3 36.7,2.025 v1(36.7,1.1) 37.375,1.1 C14.1@37.8,1.525
  Bottom Layer w0.7: v1(-36.7,-1.1) -36,-1.8 U16.2@-36,-2.35 v1(-36,-3.6) ; v1(-34.637,10.451) U15.2@-34.159,11.605 -33.949,12.114 v1(-34.327,13.028) ; v1(-33.485,-15.061) -32.571,-15.44 U17.2@-32.36,-15.948 v1(-31.882,-17.103) ; v1(-28.001,22.91) U14.2@-27.118,23.794 -26.729,24.183 v1(-26.729,25.173) ; v1(-25.173,-26.729) -24.183,-26.729 U18.2@-23.794,-27.118 v1(-22.91,-28.001) ; R77.1@-22.539,19.286 -22.15,19.286 v1(-21.496,19.94) -21.019,19.463 C48.1@-21.019,18.862 ; R80.1@-19.286,-22.539 -19.286,-22.15 v1(-19.94,-21.496) -19.463,-21.019 C50.1@-18.862,-21.019 ; v1(-17.103,31.882) U13.2@-15.948,32.36 -15.44,32.571 v1(-15.061,33.485) ; v1(-13.028,-34.327) -12.114,-33.949 U19.2@-11.605,-34.159 v1(-10.451,-34.637) ; v1(-3.5,36) U12.2@-2.35,36 -1.8,36 v1(-1.1,36.7) ; v1(1.1,-36.7) 1.8,-36 U20.2@2.35,-36 v1(3.6,-36) ; v1(10.451,34.637) U11.2@11.605,34.159 12.114,33.949 v1(13.028,34.327) ; v1(15.061,-33.485) 15.44,-32.571 U21.2@15.948,-32.36 v1(17.103,-31.882) ; C53.1@15.421,-23.659 15.265,-24.24 v1(15.603,-24.825) 16.404,-24.362 R83.1@16.779,-24.463 ; C46.1@18.862,21.019 19.463,21.019 v1(19.94,21.496) 19.286,22.15 R74.1@19.286,22.539 ; R68.1@21.602,-14.984 v1(22.09,-14.139) ; v1(22.91,28.001) U10.2@23.794,27.118 24.183,26.729 v1(25.173,26.729) ; v1(23.087,-21.412) 22.481,-21.062 22.115,-19.696 U22.2@22.39,-19.22 C42.1@23.302,-17.639 v1(24.147,-18.127) ; v1(23.302,-7.189) R71.1@23.79,-6.345 ; v1(26.959,-9.906) U23.2@27.915,-9.65 ; v1(28.171,-10.606) U23.2@27.915,-9.65 ; v1(30.65,-8.112) 30.206,-8.231 C44.1@29.102,-7.593 U23.2@28.19,-9.174 U23.2@27.915,-9.65 ; v1(31.882,17.103) U9.2@32.36,15.948 32.571,15.44 v1(33.485,15.061) ; v1(36,3.6) U8.2@36,2.35 36,1.8 v1(36.7,1.1)
+5V_CHG: C56.1 D5.1 R84.2 R85.2 R86.1 R87.1 R88.1 R108.1 TP14.1 U28.4 U28.8 | length 48.1
  Top Layer w0.6: U28.8@-13.4,14.285 v1(-13.4,15.7) ; -11.55,4.85 -11.1,5.3 -11.1,6.2 -9.595,7.705 U28.4@-9.595,8.72
  Top Layer w0.7: R88.1@-15.3,4.775 v1(-15.3,3.8) -15.3,2.4 D5.1@-14.9,2 ; R87.1@-11.675,19.9 -11.675,20.325 v1(-11.1,20.9) -10.5,20.3 R86.1@-10.225,20.3 ; v1(-10.175,21.675) R108.1@-9.2,21.675
  Top Layer w1: C56.1@-12.4,4.4 -12,4.4 -11.55,4.85
  Top Layer w1.2: R84.2@-18.4,4.9 R85.2@-16.8,4.9 -16.8,3.9 D5.1@-15.3,2.4 ; TP14.1@-15,-1 -15,1.9 D5.1@-14.9,2 -14.35,2.55 -13.594,2.55 -12.4,3.744 C56.1@-12.4,4.4
  Bottom Layer w0.7: v1(-15.3,3.8) -17.8,6.3 -17.8,10.402 -16.402,11.8 -14.902,11.8 -14.2,12.502 -14.2,14.9 v1(-13.4,15.7) -13.4,18.6 v1(-11.1,20.9) -10.95,20.9 v1(-10.175,21.675)
+VBAT: BAT1.1 C55.1 C57.1 C59.1 C60.2 C61.2 C71.1 L1.1 Q5.2 Q7.2 R95.1 R102.1 TP18.1 U28.5 U29.5 U30.3 U32.1@-7.789,34.289 | length 118.5
  Top Layer w0.3: U30.3@14.74,26 16.375,26 C61.2@16.475,25.9
  Top Layer w0.55: C57.1@-11.725,-17.3 -11.49,-17.065 U29.5@-11.49,-15.85 ; C71.1@-9.159,34.089 -7.872,34.345 U32.1@-7.789,34.289 ; R102.1@6.025,32.7 6.65,33.325 Q7.2@6.65,34.15
  Top Layer w0.6: U28.5@-9.595,14.28 -9.595,15.605 -9.5,15.7
  Top Layer w0.7: v1(-12.7,-17.3) C57.1@-11.725,-17.3 ; C71.1@-9.159,34.089 -8.17,33.1 -6.66,33.1 -6.25,32.69 Q5.2@-6.25,32.45 ; R95.1@-4.625,33.8 -4.9,33.8 Q5.2@-6.25,32.45 ; R102.1@6.025,32.7 ccw(c6.025,32.675) 6,32.675 TP18.1@6,31 6,29.65 ; 7.8,28.3 7.758,28.342 6.45,29.65 6,29.65 ; C61.2@16.475,25.9 L1.1@16.475,27.775 ; Q5.2@-6.25,32.45 -3.45,29.65 6,29.65
  Top Layer w1: 7.8,28.3 8.3,28.8 8.3,29.8 8.7,30.2 10.7,30.2 11.4,29.5 C59.1@11.4,28.8 12.125,29.525 C60.2@12.9,29.525 13.075,29.7 15.3,29.7 16.5,28.5 L1.1@16.5,27.8
  Top Layer w1.2: -9.5,15.7 C55.1@-9.5,16.6 v1(-8.4,16.6) -3.4,16.6 BAT1.1@0,20 0,20.5 7.8,28.3
  Mid 2 (PWR) w0.4: v1(-12.7,-17.3) -13.4,-17.3 -16.5,-14.2 -16.5,-13.4 -14,-10.9 -14,-8.3 -17.9,-4.4 -17.9,3.4 -18.8,4.3 -18.8,10.8 -16.2,13.4 -16.2,14.5 -13.5,17.2 -9,17.2 v1(-8.4,16.6)
-VBAT: BAT1.2 F2.1 TP19.1 | length 47.6
  Top Layer w1: TP19.1@-6,-24 -5.6,-24.4 v1(-5.6,-25.6) ; v1(-5.6,-25.6) v1(-5.6,-26.5) -7.7,-26.5 -8.5,-25.7 F2.1@-8.5,-24.95 -7.85,-24.95 -7.2,-25.6 v1(-5.6,-25.6)
  Mid 1 (GND) w1: TP19.1@-6,-24 -5.6,-24.4 v1(-5.6,-25.6) v1(-5.6,-26.5)
  Mid 2 (PWR) w1: TP19.1@-6,-24 -5.6,-24.4 v1(-5.6,-25.6) v1(-5.6,-26.5)
  Bottom Layer w1: v1(-5.6,-25.6) -5.6,-24.8 -4.8,-24 BAT1.2@-4,-24 ; v1(-5.6,-25.6) BAT1.2@-4,-24 ; v1(-5.6,-25.6) -6,-25.2 TP19.1@-6,-24 BAT1.2@-4,-24 ; v1(-5.6,-25.6) v1(-5.6,-26.5) -4,-26.5 0,-22.5 BAT1.2@0,-21.4 ; v1(-5.6,-25.6) -4.2,-25.6 BAT1.2@0,-21.4 ; BAT1.2@-4,-24 BAT1.2@0,-20 BAT1.2@0,-21.4
-VBAT_PROT: C57.2 F2.2 Q3.6 Q3.7 U29.6 | length 20.3
  Top Layer w0.45: Q3.6@-8.125,-16.725 -8.125,-18.325 -7.8,-18.65 ; Q3.7@-7.475,-16.725 -7.475,-18.325 -7.8,-18.65 ; -7.35,-18.65 -7.8,-18.65
  Top Layer w0.55: U29.6@-10.55,-15.85 -10.55,-17.025 C57.2@-10.275,-17.3 -9.4,-18.175 -9.4,-21.15 F2.2@-8.5,-22.05
  Top Layer w1.8: F2.2@-8.5,-22.05 F2.2@-7.7,-21.25
  Top Layer w2: F2.2@-7.7,-21.25 -5.35,-21.25 -4.6,-20.5 -4.6,-19.4 -5.35,-18.65 -7.35,-18.65
ADC_MUX: M1.7 U2.6 | length 8.3
  Top Layer w0.2: U2.6@15.25,3.25 15.55,3.25 15.9,2.9 15.9,1.2 16.329,0.771 17.71,0.771 18.937,0.063 19.241,-1.073 18.846,-1.758 M1.7@18.955,-2.168
B1: R27.2 R28.2 U9.6 | length 16.2
  Top Layer w0.2: v1(33.7,1) 33.3,0.6 33.3,-0.625 R27.2@34.2,-1.525 34.575,-1.9 35.275,-1.9 R28.2@35.575,-2.2
  Bottom Layer w0.2: U9.6@32.681,10.993 33.193,10.781 cw(c0,0) 34.689,3.83 34.46,3.6 33.841,3.6 33.5,3.259 33.5,1.2 v1(33.7,1)
B2: R30.2 R31.2 U10.6 | length 16.2
  Top Layer w0.2: v1(30.752,13.82) 30.536,13.298 31.004,12.166 R30.2@32.18,11.679 32.67,11.476 33.317,11.744 R31.2@33.709,11.581
  Bottom Layer w0.2: U10.6@25.986,22.663 26.541,22.663 cw(c0,0) 30.583,16.813 30.459,16.513 29.887,16.276 29.703,15.831 30.491,13.929 v1(30.752,13.82)
B3: R33.2 R34.2 U11.6 | length 16.2
  Top Layer w0.2: v1(23.122,24.537) 23.122,23.971 23.989,23.105 R33.2@25.261,23.105 25.792,23.105 26.287,23.6 R34.2@26.711,23.6
  Bottom Layer w0.2: U11.6@15.335,30.882 15.848,31.094 cw(c0,0) 21.821,27.237 21.821,26.912 21.383,26.474 21.383,25.993 22.84,24.537 v1(23.122,24.537)
B4: R36.2 R37.2 U12.6 | length 16.2
  Top Layer w0.2: v1(11.973,31.517) 12.189,30.995 13.321,30.526 R36.2@14.497,31.013 14.987,31.216 15.255,31.863 R37.2@15.647,32.025
  Bottom Layer w0.2: U12.6@2.35,34.4 2.742,34.792 cw(c0,0) 9.737,33.514 ; 9.737,33.514 9.861,33.214 9.624,32.642 9.809,32.197 11.711,31.409 v1(11.973,31.517)
B5: R39.2 R40.2 U13.6 | length 17.6
  Top Layer w0.2: v1(-1,33.7) -0.7,33.4 0.725,33.4 R39.2@1.525,34.2 1.9,34.575 1.9,35.275 R40.2@2.2,35.575
  Bottom Layer w0.2: U13.6@-10.993,32.681 -10.781,33.193 cw(c0,0) -9.098,33.693 -8.7,34.092 -8.7,34.7 -8.349,35.051 -5.589,35.6 -4.2,35.6 -3.6,35 -3.6,33.841 -3.259,33.5 -1.2,33.5 v1(-1,33.7)
B6: R42.2 R43.2 U14.6 | length 16.2
  Top Layer w0.2: v1(-13.82,30.752) -13.298,30.536 -12.166,31.004 R42.2@-11.679,32.18 -11.476,32.67 -11.744,33.317 R43.2@-11.581,33.709
  Bottom Layer w0.2: U14.6@-22.663,26.541 cw(c0,0) -16.814,30.583 ; U14.6@-22.663,25.986 U14.6@-22.663,26.541 ; -16.813,30.583 -16.513,30.459 -16.276,29.887 -15.831,29.703 -13.929,30.491 v1(-13.82,30.752)
B7: R45.2 R46.2 U15.6 | length 16.2
  Top Layer w0.2: v1(-24.537,23.122) -23.971,23.122 -23.105,23.989 R45.2@-23.105,25.261 -23.105,25.792 -23.6,26.287 R46.2@-23.6,26.711
  Bottom Layer w0.2: U15.6@-31.095,15.848 cw(c0,0) -27.237,21.821 -26.912,21.821 -26.474,21.383 -25.993,21.383 -24.537,22.84 v1(-24.537,23.122) ; U15.6@-31.094,15.848 U15.6@-30.882,15.335
B8: R48.2 R49.2 U16.6 | length 16.2
  Top Layer w0.2: R49.2@-32.025,15.647 -31.863,15.255 -31.216,14.987 R48.2@-31.013,14.497 -30.526,13.321 -30.995,12.189 v1(-31.517,11.973)
  Bottom Layer w0.2: U16.6@-34.4,2.35 -34.792,2.742 cw(c0,0) -33.515,9.737 -33.214,9.861 -32.642,9.624 -32.197,9.809 -31.409,11.711 v1(-31.517,11.973)
B9: R51.2 R52.2 U17.6 | length 16.2
  Top Layer w0.2: R52.2@-35.575,2.2 -35.275,1.9 -34.575,1.9 R51.2@-34.2,1.525 -33.3,0.625 -33.3,-0.6 v1(-33.7,-1)
  Bottom Layer w0.2: v1(-33.7,-1) -33.5,-1.2 -33.5,-3.259 -33.841,-3.6 -34.46,-3.6 -34.689,-3.83 ccw(c0,0) -33.193,-10.781 U17.6@-32.681,-10.993
B10: R54.2 R55.2 U18.6 | length 16.2
  Top Layer w0.2: R55.2@-33.709,-11.581 -33.317,-11.744 -32.67,-11.476 R54.2@-32.18,-11.679 -31.004,-12.166 -30.536,-13.298 v1(-30.752,-13.82)
  Bottom Layer w0.2: v1(-30.752,-13.82) -30.491,-13.929 -29.703,-15.831 -29.887,-16.276 -30.459,-16.513 -30.583,-16.813 ; -30.583,-16.814 ccw(c0,0) U18.6@-26.541,-22.663 ; U18.6@-26.541,-22.663 U18.6@-25.986,-22.663
B11: R57.2 R58.2 U19.6 | length 16.2
  Top Layer w0.2: R58.2@-26.711,-23.6 -26.287,-23.6 -25.792,-23.105 R57.2@-25.261,-23.105 -23.989,-23.105 -23.122,-23.971 v1(-23.122,-24.537)
  Bottom Layer w0.2: v1(-23.122,-24.537) -22.84,-24.537 -21.383,-25.993 -21.383,-26.474 -21.821,-26.912 -21.821,-27.237 ccw(c0,0) U19.6@-15.848,-31.095 ; U19.6@-15.848,-31.094 U19.6@-15.335,-30.882
B12: R60.2 R61.2 U20.6 | length 16.2
  Top Layer w0.2: R61.2@-15.647,-32.025 -15.255,-31.863 -14.987,-31.216 R60.2@-14.497,-31.013 -13.321,-30.526 -12.189,-30.995 v1(-11.973,-31.517)
  Bottom Layer w0.2: v1(-11.973,-31.517) -11.711,-31.409 -9.809,-32.197 -9.624,-32.642 -9.861,-33.214 -9.737,-33.514 ; -9.737,-33.515 ccw(c0,0) -2.742,-34.792 U20.6@-2.35,-34.4
B13: R63.2 R64.2 U21.6 | length 16.2
  Top Layer w0.2: R64.2@-2.2,-35.575 -1.9,-35.275 -1.9,-34.575 R63.2@-1.525,-34.2 -0.625,-33.3 0.6,-33.3 v1(1,-33.7)
  Bottom Layer w0.2: v1(1,-33.7) 1.2,-33.5 3.259,-33.5 3.6,-33.841 3.6,-34.46 3.83,-34.689 ccw(c0,0) 10.781,-33.193 U21.6@10.993,-32.681
B14: R66.2 R67.2 U22.6 | length 15.5
  Top Layer w0.2: R67.2@11.581,-33.709 11.744,-33.317 11.476,-32.67 R66.2@11.679,-32.18 12.166,-31.004 13.298,-30.536 v1(13.82,-30.752)
  Bottom Layer w0.2: v1(13.82,-30.752) 13.929,-30.491 15.831,-29.703 18.5,-27.034 18.5,-23.557 18.801,-23.037 U22.6@18.654,-22.49
B15: R69.2 R70.2 U23.6 | length 11
  Bottom Layer w0.2: R70.2@17.96,-19.693 R69.2@18.635,-18.524 18.342,-17.431 18.904,-16.457 19.86,-16.201 21.41,-13.516 24.279,-12.747 U23.6@24.454,-12.444
B16: R72.2 R73.2 U24.6 | length 44.6
  Top Layer w0.2: U24.6@24.006,20.683 24.183,20.506 v1(24.89,21.213)
  Mid 2 (PWR) w0.2: v1(29.5,-3.3) 30.2,-3.3 30.7,-2.8 v1(31.2,-2.8)
  Bottom Layer w0.2: R73.2@22.04,-9.376 R72.2@22.74,-8.164 22.456,-7.105 23.766,-4.836 v1(29.5,-3.3) ; v1(24.89,21.213) 25.456,21.213 27.208,21.213 cw(c0,0) 29.876,17.253 29.225,15.679 31.636,9.857 33.254,9.187 cw(c0,0) 34.204,4.506 33,3.302 33,-1.4 31.6,-2.8 v1(31.2,-2.8)
B17: R75.2 R76.2 U25.6 | length 61
  Top Layer w0.2: v1(-21.213,24.89) -20.506,24.183 U25.6@-20.683,24.006
  Bottom Layer w0.2: v1(-21.213,24.89) -21.213,25.456 -21.214,27.207 ; -21.214,27.207 cw(c0,0) -17.253,29.876 -15.679,29.224 -9.22,31.9 -5.6,31.9 -3.8,30.1 -3,30.1 0.4,33.5 3.499,33.5 4.238,34.239 cw(c0,0) 8.926,33.325 9.578,31.752 15.4,29.34 17.018,30.01 ; 17.019,30.01 cw(c0,0) 21,27.372 21,25.669 23.564,23.105 R75.2@23.564,21.408 23.564,20.877 23.069,20.382 R76.2@23.069,19.958
B18: R78.2 R79.2 U26.6 | length 60.6
  Top Layer w0.2: v1(-24.89,-21.213) -24.183,-20.506 U26.6@-24.006,-20.683
  Bottom Layer w0.2: -34.239,4.238 -33,3 -33,-3.302 -34.205,-4.506 ccw(c0,0) -33.255,-9.187 ; -34.239,4.238 cw(c0,0) -33.326,8.926 -31.752,9.578 -29.341,15.4 -30.011,17.018 ; -33.255,-9.187 -31.636,-9.857 -29.225,-15.679 -29.877,-17.253 ccw(c0,0) -27.208,-21.214 -25.456,-21.214 v1(-24.89,-21.213) ; -30.011,17.019 cw(c0,0) -27.373,21 -25.669,21 -23.105,23.564 ; -23.105,23.564 R78.2@-21.408,23.564 -20.877,23.564 -20.382,23.069 R79.2@-19.958,23.069
B19: R81.2 R82.2 U27.6 | length 50.4
  Top Layer w0.2: U27.6@13.765,-28.542 13.548,-28.666 v1(14.048,-29.532)
  Bottom Layer w0.2: -23.565,-23.105 -21,-25.669 -21,-27.373 ccw(c-0.001,0) -17.019,-30.01 ; -23.564,-23.105 R81.2@-23.564,-21.408 -23.564,-20.877 -23.069,-20.382 R82.2@-23.069,-19.958 ; -17.019,-30.011 -15.4,-29.34 -9.578,-31.752 -8.927,-33.326 ccw(c0,0) -4.239,-34.239 -3,-33 3.302,-33 4.506,-34.205 ccw(c0,0) 9.186,-33.255 9.857,-31.636 13.938,-29.946 v1(14.048,-29.532)
BMS_CS: R92.1 U29.2 | length 1.7
  Top Layer w0.2: R92.1@-11.725,-11.5 -11.5,-11.725 U29.2@-11.5,-13.15
BMS_OC: Q3.4 U29.3 | length 6.6
  Top Layer w0.2: U29.3@-12.45,-13.15 -12.6,-13 -12.6,-10.9 -12.2,-10.5 -8.9,-10.5 -8.775,-10.625 Q3.4@-8.775,-10.875
BMS_OD: Q3.5 U29.1@-10.55,-13.15 | length 4.3
  Top Layer w0.2: U29.1@-10.55,-13.15 -10.55,-13.75 -8.775,-15.525 Q3.5@-8.775,-16.725
CHG_A: D2.2 D8.1 J1.1 TP15.1 | length 14.7
  Top Layer w1.5: J1.1@28,0 28,3.6 D8.1@30.4,6 D2.2@30.4,9.5
  Bottom Layer w1.5: J1.1@28,0 TP15.1@31,3
CHG_B: D3.2 D9.1 J2.1 TP16.1 | length 13.5
  Top Layer w1.5: D9.1@-18.7,18 -18.7,18.25 -17.65,19.3 -15.65,19.3 -15.5,19.45 D3.2@-15.5,19.7 -15.35,19.85 -15.35,21.35 -14,22.7 J2.1@-14,24.249
  Bottom Layer w1.5: TP16.1@-17,27 -14.249,24.249 J2.1@-14,24.249
CHG_C: D4.2 D10.1 J3.1 TP17.1 | length 14.7
  Top Layer w1.5: D4.2@-15,-19.6 -14.85,-19.75 -14.85,-23.399 J3.1@-14,-24.249 -14,-27.1 D10.1@-12.1,-29
  Bottom Layer w1.5: TP17.1@-17,-27 -14.249,-24.249 J3.1@-14,-24.249
CHG_CHRG: D7.1 U28.7 | length 2.7
  Top Layer w0.2: D7.1@-12.7,16.7 -12.135,16.135 U28.7@-12.135,14.28
CHG_PROG: R91.1 U28.2 | length 3.4
  Top Layer w0.2: R91.1@-13.9,6.225 -13.5,6.625 -13.5,6.949 -12.584,7.865 -12.34,7.865 -12.135,8.07 U28.2@-12.135,8.72
CHG_STDBY: D6.1 U28.6 | length 2.5
  Top Layer w0.2: D6.1@-11.1,16.7 -10.865,16.465 U28.6@-10.865,14.28
CHG_TEMP: R88.2 R89.1 R90.1 U28.1@-13.405,8.72 | length 12.5
  Top Layer w0.2: R88.2@-15.3,6.225 -14.96,6.565 -14.96,7.14 v1(-14.9,7.2) R90.1@-14.9,8.175 -13.61,8.175 -13.405,8.38 U28.1@-13.405,8.72 ; v1(-13.4,0.5) -12.625,0.5 R89.1@-12.4,0.725
  Mid 2 (PWR) w0.2: v1(-14.9,7.2) -14.6,6.9 -14.6,1.7 v1(-13.4,0.5)
D1: R31.1 U8.3 U9.4 | length 11.8
  Top Layer w0.2: R31.1@35.049,12.136 35.8,11.825 v1(36.116,11.063)
  Bottom Layer w0.2: U9.4@35.637,12.218 35.691,12.196 36.101,11.204 cw(c0,0) 37.641,3.464 37.641,2.391 U8.3@37.6,2.35
D2: R34.1 U9.3 U10.4 | length 11.8
  Top Layer w0.2: R34.1@27.736,24.625 28.549,24.625 v1(29.133,24.042)
  Bottom Layer w0.2: U10.4@28.249,24.926 28.307,24.926 29.066,24.167 cw(c0,0) 33.45,17.605 33.861,16.613 U9.3@33.839,16.56
D3: R37.1 U10.3 U11.4 | length 11.8
  Top Layer w0.2: R37.1@16.201,33.365 16.953,33.676 v1(17.715,33.36)
  Bottom Layer w0.2: U11.4@16.56,33.839 16.613,33.861 17.605,33.45 cw(c0,0) 24.167,29.066 24.926,28.307 U10.3@24.926,28.249
D4: R40.1 U11.3 U12.4 | length 11.8
  Top Layer w0.2: R40.1@2.2,37.025 2.775,37.6 v1(3.6,37.6)
  Bottom Layer w0.2: U12.4@2.35,37.6 2.391,37.641 3.464,37.641 cw(c0,0) 11.204,36.102 12.196,35.691 U11.3@12.218,35.637
D5: R43.1 U12.3 U13.4 | length 12.6
  Top Layer w0.2: R43.1@-12.136,35.049 -11.825,35.8 v1(-11.063,36.116)
  Bottom Layer w0.2: U13.4@-12.218,35.637 -12.196,35.691 -11.204,36.101 cw(c-0.001,0) -8.602,36.809 ; -8.6,36.8 -8.2,36.8 -7.7,36.3 -7.3,36.3 -6.926,36.374 -6.7,36.6 -6.7,36.976 -6.426,37.25 cw(c0,0) -3.465,37.641 ; -3.464,37.641 -2.391,37.641 U12.3@-2.35,37.6
D6: R46.1 U13.3 U14.4 | length 11.8
  Top Layer w0.2: R46.1@-24.625,27.736 -24.625,28.549 v1(-24.042,29.133)
  Bottom Layer w0.2: U14.4@-24.926,28.249 -24.926,28.307 v1@-24.167,29.066 ; v1@-24.167,29.066 cw(c0,0) -17.606,33.45 -16.613,33.861 U13.3@-16.56,33.839
D7: R49.1 U14.3 U15.4 | length 11.8
  Top Layer w0.2: R49.1@-33.365,16.201 -33.676,16.953 v1(-33.36,17.715)
  Bottom Layer w0.2: U15.4@-33.839,16.56 -33.861,16.613 v1@-33.45,17.605 ; v1@-33.45,17.605 cw(c0,0) -29.066,24.167 -28.307,24.926 U14.3@-28.249,24.926
D8: R52.1 U15.3 U16.4 | length 11.8
  Top Layer w0.2: v1(-37.6,3.6) -37.6,2.775 R52.1@-37.025,2.2
  Bottom Layer w0.2: v1@-37.641,3.464 cw(c0,0) -36.102,11.204 -35.691,12.196 U15.3@-35.637,12.218 ; v1@-37.641,3.464 -37.641,2.391 U16.4@-37.6,2.35
D9: R55.1 U16.3 U17.4 | length 11.8
  Top Layer w0.2: v1(-36.116,-11.063) -35.8,-11.825 R55.1@-35.049,-12.136
  Bottom Layer w0.2: -37.641,-3.465 ccw(c0,0) -36.102,-11.204 -35.691,-12.196 U17.4@-35.637,-12.218 ; -37.641,-3.464 -37.641,-2.391 U16.3@-37.6,-2.35
D10: R58.1 U17.3 U18.4 | length 11.8
  Top Layer w0.2: v1(-29.133,-24.042) -28.549,-24.625 R58.1@-27.736,-24.625
  Bottom Layer w0.2: U17.3@-33.839,-16.56 -33.861,-16.613 -33.45,-17.605 ccw(c0,0) v1@-29.066,-24.167 ; v1@-29.066,-24.167 -28.307,-24.926 U18.4@-28.249,-24.926
D11: R61.1 U18.3 U19.4 | length 11.8
  Top Layer w0.2: v1(-17.715,-33.36) -16.953,-33.676 R61.1@-16.201,-33.365
  Bottom Layer w0.2: U18.3@-24.926,-28.249 -24.926,-28.307 -24.167,-29.066 ; -24.167,-29.066 ccw(c0,0) -17.606,-33.45 -16.613,-33.861 U19.4@-16.56,-33.839
D12: R64.1 U19.3 U20.4 | length 11.8
  Top Layer w0.2: v1(-3.6,-37.6) -2.775,-37.6 R64.1@-2.2,-37.025
  Bottom Layer w0.2: U19.3@-12.218,-35.637 -12.196,-35.691 -11.204,-36.101 ccw(c0,0) v1@-3.464,-37.641 ; v1@-3.464,-37.641 -2.391,-37.641 U20.4@-2.35,-37.6
D13: R67.1 U20.3 U21.4 | length 11.8
  Top Layer w0.2: v1(11.063,-36.116) 11.825,-35.8 R67.1@12.136,-35.049
  Bottom Layer w0.2: U20.3@2.35,-37.6 2.391,-37.641 3.464,-37.641 ccw(c0,0) 11.204,-36.102 12.196,-35.691 U21.4@12.218,-35.637
D14: R70.1 U21.3 U22.4 | length 19.6
  Bottom Layer w0.2: U21.3@16.56,-33.839 16.613,-33.861 17.605,-33.45 17.84,-33.216 17.84,-30.301 U22.4@21.425,-24.09 22.4,-22.401 22.254,-21.855 19.591,-20.317 R70.1@17.235,-20.949
D15: R73.1 U22.3 U23.4 | length 15.1
  Bottom Layer w0.2: R73.1@23.295,-10.101 23.433,-10.238 23.433,-10.769 23.512,-10.848 25.478,-10.322 27.794,-11.659 28.05,-12.615 U23.4@27.225,-14.044 U22.3@23.775,-20.02
D16: R76.1 U23.3 U24.4 | length 44.5
  Top Layer w0.2: U24.4@21.744,18.42 v1(22.627,17.536)
  Bottom Layer w0.2: v1(22.627,17.536) 22.044,18.12 R76.1@22.044,18.933 23.175,18.933 24.749,20.506 25.594,20.506 27.245,20.506 cw(c0,0) 29.431,17.223 28.79,15.676 31.493,9.151 33.019,8.519 cw(c0,0) 33.782,4.649 32.598,3.465 32.598,-0.402 30.2,-2.8 30.2,-4.1 31.4,-5.3 31.4,-8.014 30.57,-9.451 29.75,-9.671 U23.3@29.575,-9.974
D17: R79.1 U24.3 U25.4 | length 63.4
  Top Layer w0.2: U25.4@-18.42,21.744 v1(-17.536,22.627) ; v1(18.031,23.122) 18.031,22.132 U24.3@18.42,21.744
  Bottom Layer w0.2: -20.507,25.594 -20.507,27.245 cw(c0,0) -17.223,29.431 -15.676,28.79 -9.134,31.5 -5.8,31.5 -4,29.7 -2.8,29.7 0.6,33.1 4.099,33.1 4.765,33.766 cw(c0,0) 8.632,32.989 9.273,31.442 15.798,28.74 17.324,29.372 ; -20.506,25.594 -20.506,24.749 -18.933,23.175 R79.1@-18.933,22.044 -18.12,22.044 v1(-17.536,22.627) ; 17.324,29.371 cw(c0,0) 20.6,27.174 20.6,25.5 19.6,24.5 18.4,24.5 18.031,24.131 v1(18.031,23.122)
D18: R82.1 U25.3 U26.4 | length 63.1
  Top Layer w0.2: v1(-23.122,18.031) -22.132,18.031 U25.3@-21.744,18.42 ; v1(-22.627,-17.536) U26.4@-21.744,-18.42
  Bottom Layer w0.2: -25.594,-20.507 -27.245,-20.507 cw(c0,0) -29.431,-17.223 -28.791,-15.676 -31.493,-9.151 -33.019,-8.519 cw(c0,0) -33.782,-4.649 -32.598,-3.465 -32.598,3.597 -33.766,4.765 cw(c0,0) -32.99,8.632 -31.443,9.273 -28.74,15.798 -29.372,17.324 cw(c0,0) -27.175,20.6 -25.5,20.6 -24.5,19.6 -24.5,18.4 -24.132,18.031 v1(-23.122,18.031) ; -25.594,-20.506 -24.749,-20.506 -23.175,-18.933 R82.1@-22.044,-18.933 -22.044,-18.12 v1(-22.627,-17.536)
D19: U26.3 U27.4 | length 51.8
  Top Layer w0.2: U26.3@-18.42,-21.744 -18.031,-22.132 v1(-18.031,-23.122) ; v1(11.082,-26.395) U27.4@12.165,-25.77
  Bottom Layer w0.2: v1(-18.031,-23.122) -18.032,-24.131 -18.4,-24.5 -19.6,-24.5 -20.6,-25.5 -20.6,-27.175 ccw(c-0.001,0) -17.325,-29.372 -15.798,-28.74 -9.274,-31.443 -8.633,-32.99 ccw(c0,0) -4.766,-33.766 -3.598,-32.598 3.465,-32.598 4.649,-33.782 ccw(c0,0) 8.519,-33.019 9.151,-31.493 13.245,-29.797 13.402,-29.213 11.902,-26.615 v1(11.082,-26.395)
DATA: R3.2 R22.2 TP1.1 U34.2 | length 33.3
  Top Layer w0.2: R22.2@-32.4,4.875 -31.675,5.6 U34.2@-30.85,5.6 v1(-29.8,5.6) ; v1(-19.375,-16.525) R3.2@-18.4,-16.525
  Mid 2 (PWR) w0.2: v1(-29.8,5.6) -28.5,4.3 -28.5,-9.2 -21.175,-16.525 v1@-19.475,-16.525 ; v1(-19.375,-16.525) -18,-17.9 TP1.1@-18,-18
DATA_5V: U4.2 U4.4 U4.5 U34.4 | length 12.5
  Top Layer w0.2: U4.5@-28.78,-2.27 -27.67,-2.27 -27.4,-2 -27.4,-1.2 -27.6,-1 ; U4.4@-28.78,-1 -27.6,-1 ; U34.4@-28.15,4.65 -27.925,4.65 -27.4,4.125 -27.4,2.27 -28.13,1.54 U4.2@-28.78,1.54 -27.64,1.54 -27,0.9 -27,-0.4 -27.6,-1
DATA_FS: J5.1 R24.2 R28.1 TP11.1 U8.4 | length 92.6
  Top Layer w0.2: R24.2@-19.975,4.7 -19.3,4.025 v1(-19.3,3.7) ; v1(30.9,-3.6) 32.35,-3.6 J5.1@32.7,-3.25 33.05,-3.6 34.3,-3.6 35,-4.3 36.9,-4.3 v1(37.6,-3.6) 37.6,-2.775 R28.1@37.025,-2.2
  Mid 2 (PWR) w0.2: v1(-19.3,3.7) -18.4,2.8 -18.4,-4.7 -14.5,-8.6 -14.5,-10.7 -17,-13.2 -17,-14.4 -12.4,-19 TP11.1@-11,-19 7.2,-19 9,-20.8 12.5,-20.8 20.6,-12.7 20.6,-8.9 25.5,-4 30.5,-4 v1(30.9,-3.6)
  Bottom Layer w0.2: U8.4@37.6,-2.35 37.641,-2.391 v1@37.641,-3.464
EEPROM_A0: R8.2 R12.1 U1.1@18.12,7.005 | length 9.1
  Top Layer w0.2: R8.2@11.425,10.9 R12.1@11.425,9.5 14,9.5 16.495,7.005 U1.1@18.12,7.005
EEPROM_A1: R7.2 R11.1 U1.2 | length 8.9
  Top Layer w0.2: R11.1@11.425,8.1 12.425,9.1 13.8,9.1 16.3,6.6 R7.2@16.3,5.925 16.49,5.735 U1.2@18.12,5.735
EEPROM_A2: R6.2 R10.1 U1.3 | length 5.4
  Top Layer w0.2: U1.3@18.12,4.465 19.035,4.465 19.675,3.825 R6.2@19.675,1.6 R10.1@18.325,1.6
EN: D11.1 D12.1 Q5.3 R100.1 R104.1 U30.2 | length 33
  Top Layer w0.2: D11.1@-11.207,30.711 -11.095,30.6 -9.825,30.6 D12.1@-9.6,30.825 -7.95,30.825 R100.1@-7.7,30.575 -7.425,30.3 v1(-6.4,30.3) -5.637,30.3 -5.3,29.963 Q5.3@-5.3,29.75 ; U30.2@14.74,25.5 15.2,25.5 v1(15.6,25.1) 16.025,25.1 R104.1@16.6,24.525
  Mid 2 (PWR) w0.2: v1(-6.4,30.3) -6.1,30 -0.7,30 2,27.3 7.7,27.3 9.2,25.8 14.9,25.8 v1(15.6,25.1)
ESP_EN: M1.3 R16.2 | length 9.6
  Top Layer w0.2: R16.2@20.075,0.2 21.712,-1.437 25.808,-3.801 26.265,-5.508 M1.3@25.884,-6.168
FS_ACT/: TP10.1 U3.3 U5.6 U7.11 | length 27.7
  Top Layer w0.2: v1(-23.3,6.6) -23.2,6.6 -22.95,6.35 U5.6@-22.45,6.35 -22.365,6.435 U3.3@-22.365,8.72 ; U7.11@-23.22,-12.905 v1(-21.7,-12.905) -20,-11.205 TP10.1@-20,-11
  Mid 2 (PWR) w0.2: v1(-23.3,6.6) -22.8,6.1 -22.8,-11.805 v1(-21.7,-12.905)
FS_DATA: TP13.1 U4.8 U5.3 | length 15.8
  Top Layer w0.2: v1(-25.2,5.05) U5.3@-24.35,5.05 ; v1(-24.7,-4.81) U4.8@-23.22,-4.81 -21.81,-4.81 TP13.1@-21,-4